# EAGLE board slice (EAGLE 5.11)
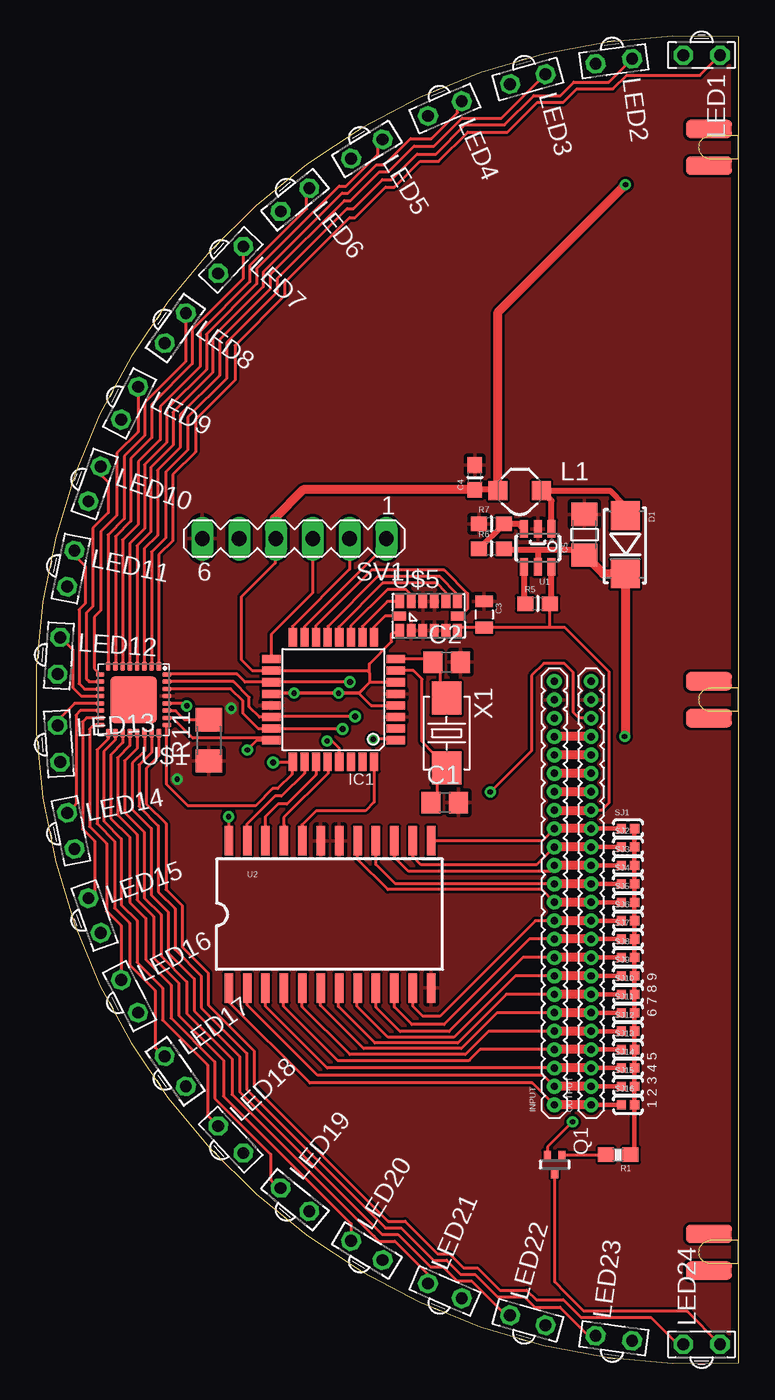
[diagram p0: board, top side]
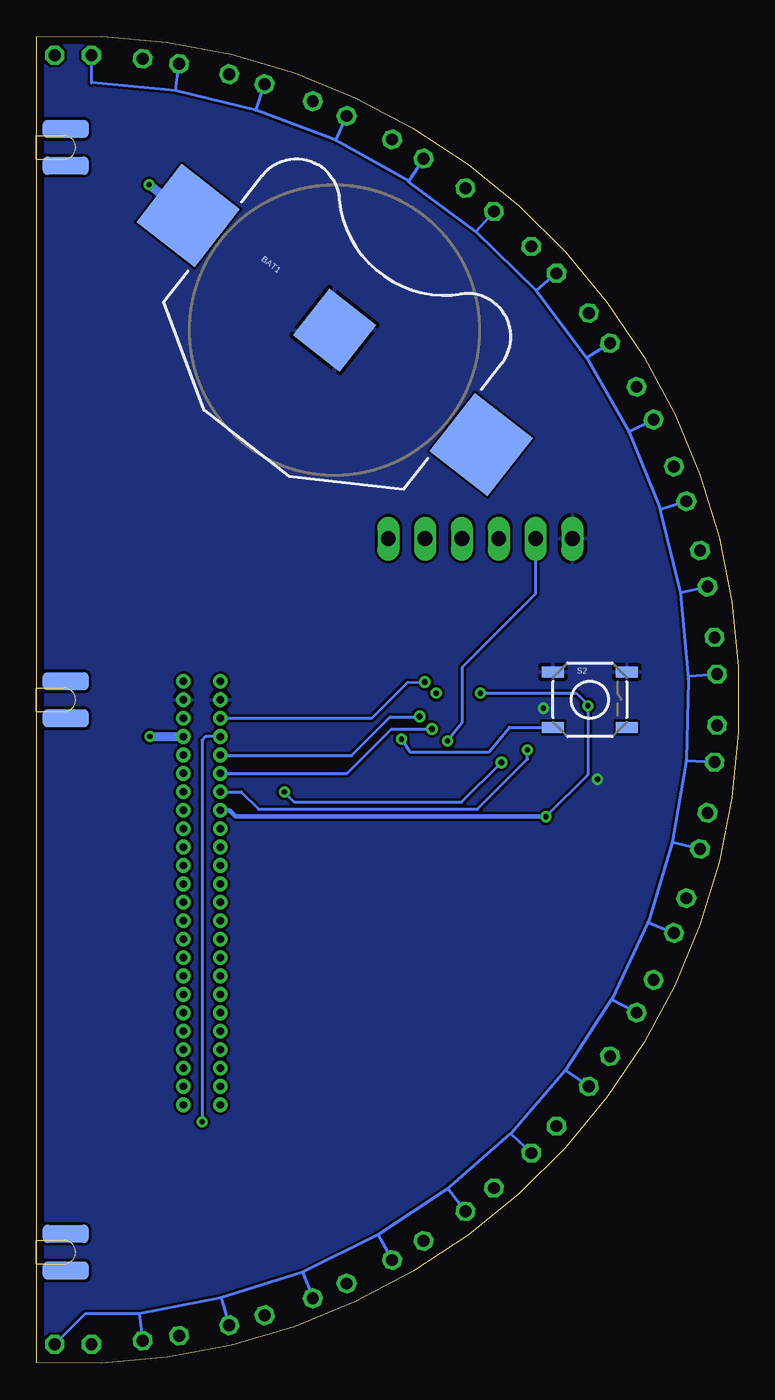
[diagram p1: board, bottom side, seen from below]

Size 48.44 x 91.53 mm. Coordinates in mm from the lower left corner, seen from the top.
Outline: 48.44,91.48 48.44,0.04 arc-187 48.44,91.48
Copper layers (1*16): Top 0.0356mm / dielectric 1.5011mm / Bottom 0.0356mm
Design rules "SilverCircuits": minimum track width 7mil, minimum drill 14mil, track to track 7mil, track to pad 7mil, pad to pad 7mil, via to via 7mil, smd to smd 0mil, copper to edge 20mil, drill to drill 8mil, minimum pad ring 10mil, minimum via ring 8mil, stop-mask expansion 4mil, vias tented up to drill 0mil, thermal gap 10mil

## Footprints (pad centres in the part's own frame; a part is rotated, then mirrored left to right if it is on the bottom)
BATTCON_20MM = smd 5.08 x 5.08: 1 -12.827,0; 3 12.827,0 | smd 4.064 x 4.064: 2 0,0
C0805 = smd 1.3 x 1.5: 1 -0.95,0; 2 0.95,0
0805 = smd 0.8 x 1.2: 1 -0.9,0; 2 0.9,0
0603 = smd 1.1 x 1: 1 -0.85,0; 2 0.85,0
1206 = smd 1.6 x 1.8: 1 -1.4,0; 2 1.4,0
SMA-DIODE = smd 2 x 2: A -2,0; C 2,0
TQFP32-08 = smd 1.27 x 0.559: 1 -4.293,2.8; 2 -4.293,2; 3 -4.293,1.2; 4 -4.293,0.4; 5 -4.293,-0.4; 6 -4.293,-1.2; 7 -4.293,-2; 8 -4.293,-2.8; 17 4.293,-2.8; 18 4.293,-2; 19 4.293,-1.2; 20 4.293,-0.4; 21 4.293,0.4; 22 4.293,1.2; 23 4.293,2; 24 4.293,2.8 | smd 0.559 x 1.27: 9 -2.8,-4.293; 10 -2,-4.293; 11 -1.2,-4.293; 12 -0.4,-4.293; 13 0.4,-4.293; 14 1.2,-4.293; 15 2,-4.293; 16 2.8,-4.293; 25 2.8,4.293; 26 2,4.293; 27 1.2,4.293; 28 0.4,4.293; 29 -0.4,4.293; 30 -1.2,4.293; 31 -2,4.293; 32 -2.8,4.293
1X24-1.27MM = drill 0.508 pad 1 round: 1 0,0; 2 1.27,0; 3 2.54,0; 4 3.81,0; 5 5.08,0; 6 6.35,0; 7 7.62,0; 8 8.89,0; 9 10.16,0; 10 11.43,0; 11 12.7,0; 12 13.97,0; 13 15.24,0; 14 16.51,0; 15 17.78,0; 16 19.05,0; 17 20.32,0; 18 21.59,0; 19 22.86,0; 20 24.13,0; 21 25.4,0; 22 26.67,0; 23 27.94,0; 24 29.21,0
1_3X1_3 = smd 1.3 x 1.3: P$1 -1.5,0; P$2 1.5,0
IRL80A = drill 0.813 octagon: A 0,-1.27; K 0,1.27
SOT416 = smd 0.6 x 0.5: 1 -0.65,0; 2 0.65,-0.5; 3 0.65,0.5
SPARKFUN_0603-RES = smd 1.1 x 1: 1 -0.85,0; 2 0.85,0
R1206 = smd 1.6 x 1.803: 1 -1.422,0; 2 1.422,0
TACTILE_SWITCH_SMD = smd 1.524 x 0.762: 1 -2.54,1.905; 2 2.54,1.905; 3 -2.54,-1.905; 4 2.54,-1.905
SJ_2S-NO = smd 0.635 x 0.635: 1 -0.45,0; 2 0.45,0
MA06-1 = drill 1.016 long: 1 -6.35,0; 2 -3.81,0; 3 -1.27,0; 4 1.27,0; 5 3.81,0; 6 6.35,0
SOT23-6 = smd 0.55 x 1.2: 1 -0.95,-1.3; 2 0,-1.3; 3 0.95,-1.3; 4 0.95,1.3; 5 0,1.3; 6 -0.95,1.3
SO-24DW = smd 0.584 x 2.032: 1 -6.35,-5.08; 2 -5.08,-5.08; 3 -3.81,-5.08; 4 -2.54,-5.08; 5 -1.27,-5.08; 6 0,-5.08; 7 1.27,-5.08; 8 2.54,-5.08; 9 3.81,-5.08; 10 5.08,-5.08; 11 6.35,-5.08; 12 7.62,-5.08; 13 7.62,5.08; 14 6.35,5.08; 15 5.08,5.08; 16 3.81,5.08; 17 2.54,5.08; 18 1.27,5.08; 19 0,5.08; 20 -1.27,5.08; 21 -2.54,5.08; 22 -3.81,5.08; 23 -5.08,5.08; 24 -6.35,5.08
QFN32 = smd 0.3 x 0.6: 1 -1.75,-2.3; 2 -1.25,-2.3; 3 -0.75,-2.3; 4 -0.25,-2.3; 5 0.25,-2.3; 6 0.75,-2.3; 7 1.25,-2.3; 8 1.75,-2.3; 17 1.75,2.3; 18 1.25,2.3; 19 0.75,2.3; 20 0.25,2.3; 21 -0.25,2.3; 22 -0.75,2.3; 23 -1.25,2.3; 24 -1.75,2.3 | smd 0.6 x 0.3: 9 2.3,-1.75; 10 2.3,-1.25; 11 2.3,-0.75; 12 2.3,-0.25; 13 2.3,0.25; 14 2.3,0.75; 15 2.3,1.25; 16 2.3,1.75; 25 -2.3,1.75; 26 -2.3,1.25; 27 -2.3,0.75; 28 -2.3,0.25; 29 -2.3,-0.25; 30 -2.3,-0.75; 31 -2.3,-1.25; 32 -2.3,-1.75 | smd 3.2 x 3.2: EXP 0,0
SLOT = smd 3.175 x 1.27: P$1 2.032,1.27; P$2 2.032,-1.27 | smd 3.175 x 1.27 bottom: P$3 2.032,1.27; P$4 2.032,-1.27
LGA-14 = smd 0.6 x 0.9: 1 -2,-1; 2 -1.2,-1; 3 -0.4,-1; 4 0.4,-1; 5 1.2,-1; 6 2,-1; 8 2,1; 9 1.2,1; 10 0.4,1; 11 -0.4,1; 12 -1.2,1; 13 -2,1 | smd 0.9 x 0.6: 7 2,0; 14 -2,0
5032 = smd 2.286 x 2.032: 1 -2.413,0; 2 2.413,0

## Placement (x,y rotation side)
BAT1  [BATTCON_20MM]  27.86,71.26 322 bottom
C1  [C0805]  28.19,38.67 0 top
C2  [C0805]  28.31,48.35 0 top
C3  [0805]  30.9,51.65 270 top
C4  10uF  [0603]  30.26,61.09 90 top
C5  22uF  [1206]  37.82,57.15 90 top
D1  MBRA210LT3G  [SMA-DIODE]  40.63,56.46 270 top
IC1  MEGA8-AI  [TQFP32-08]  20.5,45.77 180 top
INPUT  1X24-1.27MM  [1X24-1.27MM]  35.74,17.82 90 top
L1  2.2uH  [1_3X1_3]  33.36,60.18 0 top
LED1  [IRL80A]  45.9,90.21 270 top
LED2  [IRL80A]  39.85,89.8 277.8 top
LED3  [IRL80A]  33.91,88.57 285.7 top
LED4  [IRL80A]  28.2,86.53 293.5 top
LED5  [IRL80A]  22.81,83.74 301.3 top
LED6  [IRL80A]  17.85,80.24 309.1 top
LED7  [IRL80A]  13.42,76.1 317 top
LED8  [IRL80A]  9.59,71.4 324.8 top
LED9  [IRL80A]  6.44,66.21 332.6 top
LED10  [IRL80A]  4.02,60.65 340.4 top
LED11  [IRL80A]  2.38,54.81 348.3 top
LED12  [IRL80A]  1.56,48.8 356.1 top
LED13  [IRL80A]  1.56,42.73 3.9 top
LED14  [IRL80A]  2.38,36.72 11.7 top
LED15  [IRL80A]  4.02,30.88 19.6 top
LED16  [IRL80A]  6.44,25.31 27.4 top
LED17  [IRL80A]  9.59,20.13 35.2 top
LED18  [IRL80A]  13.42,15.42 43 top
LED19  [IRL80A]  17.85,11.28 50.9 top
LED20  [IRL80A]  22.81,7.79 58.7 top
LED21  [IRL80A]  28.19,4.99 66.5 top
LED22  [IRL80A]  33.91,2.96 74.3 top
LED23  [IRL80A]  39.85,1.73 82.2 top
LED24  [IRL80A]  45.9,1.31 90 top
OUTPUT  1X24-1.27MM  [1X24-1.27MM]  38.28,17.82 90 top
Q1  BC857AT115  [SOT416]  35.77,13.71 90 top
R1  620  [SPARKFUN_0603-RES]  40.15,14.39 180 top
R5  1M  [0603]  34.6,52.39 0 top
R6  95.3K  [0603]  31.4,56.19 0 top
R7  30.9K  [0603]  31.4,57.89 0 top
R11  [R1206]  11.91,42.96 90 top
S2  [TACTILE_SWITCH_SMD]  10.25,45.76 0 bottom
SJ1  SOLDERJUMPERNO  [SJ_2S-NO]  40.82,36.87 0 top
SJ2  SOLDERJUMPERNO  [SJ_2S-NO]  40.82,35.6 0 top
SJ3  SOLDERJUMPERNO  [SJ_2S-NO]  40.82,34.33 0 top
SJ4  SOLDERJUMPERNO  [SJ_2S-NO]  40.82,33.06 0 top
SJ5  SOLDERJUMPERNO  [SJ_2S-NO]  40.82,31.79 0 top
SJ6  SOLDERJUMPERNO  [SJ_2S-NO]  40.82,30.52 0 top
SJ7  SOLDERJUMPERNO  [SJ_2S-NO]  40.82,29.25 0 top
SJ8  SOLDERJUMPERNO  [SJ_2S-NO]  40.82,27.98 0 top
SJ9  SOLDERJUMPERNO  [SJ_2S-NO]  40.82,26.71 0 top
SJ10  SOLDERJUMPERNO  [SJ_2S-NO]  40.82,25.44 0 top
SJ11  SOLDERJUMPERNO  [SJ_2S-NO]  40.82,24.17 0 top
SJ12  SOLDERJUMPERNO  [SJ_2S-NO]  40.82,22.9 0 top
SJ13  SOLDERJUMPERNO  [SJ_2S-NO]  40.82,21.63 0 top
SJ14  SOLDERJUMPERNO  [SJ_2S-NO]  40.82,20.36 0 top
SJ15  SOLDERJUMPERNO  [SJ_2S-NO]  40.82,19.09 0 top
SJ16  SOLDERJUMPERNO  [SJ_2S-NO]  40.82,17.82 0 top
SV1  [MA06-1]  17.81,56.88 180 top
U1  LTC3426  [SOT23-6]  34.6,56.24 180 top
U2  CD74HC154M  [SO-24DW]  19.63,30.96 0 top
U$1  TLC5947  [QFN32]  6.71,45.76 180 top
U$2  SLOT  [SLOT]  48.44,83.86 180 top
U$3  SLOT  [SLOT]  48.44,45.76 180 top
U$4  SLOT  [SLOT]  48.44,7.66 180 top
U$5  MMA7455L  [LGA-14]  27.07,51.54 0 top
X1  [5032]  28.32,43.46 270 top

## Library data of the parts
BAT1 C3 S2 U2 = SparkFun
C1 C2 R11 = rcl
C4 C5 L1 R5-R7 = CH_passive
D1 = CH_semiconductors
IC1 = atmel; MPN: ATMEGA8-16AU; OC_FARNELL: 9171371; OC_NEWARK: 73M8863
INPUT OUTPUT SJ1-SJ16 U$2-U$4 = slice
LED1-LED24 = led
Q1 = zetex
R1 = Nullspace
SV1 = NSL
U1 = CH_Linear_technology
U$1 = lil_rgb
U$5 = MMA7455Lbreakoutboard-v1a
X1 = NSL_MiniQuad

## Nets
5V+: C5.1 D1.C INPUT.21 OUTPUT.21 Q1.3 R6.2 U1.5
!CS: IC1.14 U$5.7
A0: IC1.26 U2.23
A1: IC1.27 U2.22
A2: IC1.28 U2.21
A3: IC1.32 U2.20
BLANK: IC1.23 INPUT.19 OUTPUT.19 U$1.30
BUTTON: IC1.1 S2.3
COL1: LED1.K U$1.1
COL2: LED2.K U$1.2
COL3: LED3.K U$1.3
COL4: LED4.K U$1.4
COL5: LED5.K U$1.5
COL6: LED6.K U$1.6
COL7: LED7.K U$1.7
COL8: LED8.K U$1.8
COL9: LED9.K U$1.9
COL10: LED10.K U$1.10
COL11: LED11.K U$1.11
COL12: LED12.K U$1.12
COL13: LED13.K U$1.13
COL14: LED14.K U$1.14
COL15: LED15.K U$1.15
COL16: LED16.K U$1.16
COL17: LED17.K U$1.17
COL18: LED18.K U$1.18
COL19: LED19.K U$1.19
COL20: LED20.K U$1.20
COL21: LED21.K U$1.21
COL22: LED22.K U$1.22
COL23: LED23.K U$1.23
COL24: LED24.K U$1.24
GND: BAT1.2 C1.2 C2.2 C3.1 C4.2 C5.2 IC1.3 IC1.5 IC1.21 INPUT.23 OUTPUT.23 R7.1 R11.1 S2.1 S2.2 SV1.6 U1.2 U2.12 U2.18 U2.19 U$1.29 U$5.2 U$5.3 U$5.4 U$5.5 U$5.10 U$5.11
INT1/DRDY: IC1.13 U$5.8
INT2: IC1.12 U$5.9
LINE1: LED1.A LED2.A LED3.A LED4.A LED5.A LED6.A LED7.A LED8.A LED9.A LED10.A LED11.A LED12.A LED13.A LED14.A LED15.A LED16.A LED17.A LED18.A LED19.A LED20.A LED21.A LED22.A LED23.A LED24.A Q1.1
MISO: IC1.16 SV1.2
MOSI: IC1.15 SV1.1
N$1: R5.1 U1.4
N$2: Q1.2 R1.2
N$3: IC1.2
N$6: IC1.31
N$7: C1.1 IC1.7 X1.2
N$8: C2.1 IC1.8 X1.1
N$9: IC1.30
N$13: R11.2 U$1.27
N$22: D1.A L1.P$2 U1.1
N$28: R6.1 R7.2 U1.3
ROW: R1.1 SJ1.2 SJ2.2 SJ3.2 SJ4.2 SJ5.2 SJ6.2 SJ7.2 SJ8.2 SJ9.2 SJ10.2 SJ11.2 SJ12.2 SJ13.2 SJ14.2 SJ15.2 SJ16.2
ROW1: INPUT.1 OUTPUT.1 SJ16.1 U2.1
ROW2: INPUT.2 OUTPUT.2 SJ15.1 U2.2
ROW3: INPUT.3 OUTPUT.3 SJ14.1 U2.3
ROW4: INPUT.4 OUTPUT.4 SJ13.1 U2.4
ROW5: INPUT.5 OUTPUT.5 SJ12.1 U2.5
ROW6: INPUT.6 OUTPUT.6 SJ11.1 U2.6
ROW7: INPUT.7 OUTPUT.7 SJ10.1 U2.7
ROW8: INPUT.8 OUTPUT.8 SJ9.1 U2.8
ROW9: INPUT.9 OUTPUT.9 SJ8.1 U2.9
ROW10: INPUT.10 OUTPUT.10 SJ7.1 U2.10
ROW11: INPUT.11 OUTPUT.11 SJ6.1 U2.11
ROW12: INPUT.16 OUTPUT.16 SJ1.1 U2.13
ROW13: INPUT.15 OUTPUT.15 SJ2.1 U2.14
ROW14: INPUT.14 OUTPUT.14 SJ3.1 U2.15
ROW15: INPUT.13 OUTPUT.13 SJ4.1 U2.16
ROW16: INPUT.12 OUTPUT.12 SJ5.1 U2.17
RST: IC1.29 SV1.5
SCK: IC1.17 SV1.3
SCL/SPC: IC1.10 U$5.13
SCLK: IC1.22 INPUT.20 OUTPUT.20 U$1.31
SDA/SDI/SDO: IC1.11 U$5.12
SDO: IC1.9 U$5.14
SIN: IC1.19 INPUT.22 U$1.32
SOUT: IC1.25 OUTPUT.22 U$1.25
VCC: BAT1.1 C3.2 C4.1 IC1.4 IC1.6 IC1.18 IC1.20 INPUT.17 L1.P$1 OUTPUT.17 R5.2 SV1.4 U1.6 U2.24 U$1.28 U$5.1 U$5.6
XLAT: IC1.24 INPUT.18 OUTPUT.18 U$1.26

## Tracks (layer width: path | path; a pad name or v marks a point on that pad's centre or on a via)
5V+  (via drill 0.36)
  Top 0.203: Q1.3 35.27,14.92 v37.01,16.66
  Top 0.406: R6.2 32.34,56.1 34.62,56.1 | 34.62,56.1 37.12,56.1 37.47,55.75 C5.1 | U1.5 34.62,54.96 34.62,56.1
  Top 0.61: OUTPUT.21 INPUT.21 | v40.6,43.24 40.63,43.27 D1.C 39.11,54.46 C5.1
  Bottom 0.203: v37.01,16.66 37.01,42.97 36.75,43.22 INPUT.21
  Bottom 0.61: v40.6,43.24 38.3,43.24 OUTPUT.21
!CS
  Top 0.203: IC1.14 19.27,50.1 19.27,50.85 23.11,54.7 28.15,54.7 29.75,53.1 29.75,52.03 29.26,51.54 U$5.7
A0
  Top 0.203: U2.23 14.52,36.07 14.52,37.17 16.46,39.11 16.92,39.11 18.5,40.69 IC1.26
A1
  Top 0.203: U2.22 15.82,37.04 15.8,37.06 15.8,37.69 16.68,38.57 17.29,38.57 19.29,40.58 19.29,41.47 IC1.27
A2
  Top 0.203: U2.21 17.09,37.16 17.08,37.17 17.08,37.63 20.12,40.67 20.12,41.47 IC1.28
A3
  Top 0.203: U2.20 18.36,37.11 18.34,37.13 19.31,38.11 22.71,38.11 23.3,38.7 IC1.32
BLANK  (via drill 0.41)
  Top 0.203: U$1.30 13.42,46.51 14.26,45.68 14.26,44.82 15.32,43.75 16.19,43.75 IC1.23 16.24,43.75 v21.13,43.75
  Top 0.61: OUTPUT.19 INPUT.19
  Bottom 0.203: INPUT.19 26.99,40.68 23.93,43.75 v21.14,43.75 v21.13,43.75
BUTTON  (via drill 0.36)
  Top 0.203: IC1.1 24.73,43.04 v23.25,43.04
  Bottom 0.203: 12.79,43.61 S2.3 15.8,43.86 17.2,42.17 22.67,42.17 v23.25,43.04
COL1
  Top 0.203: U$1.1 8.46,55.76 9.42,56.72 9.42,61.28 10.99,62.85 10.99,65.1 13.71,67.81 13.71,70.2 17.14,73.63 17.14,74.54 21.62,79.02 22,79.02 24.1,81.13 24.71,81.13 26.48,82.9 27.76,82.9 29.78,84.92 32.52,84.92 34.56,86.97 36.37,86.97 37.29,87.89 39.79,87.89 40.73,88.83 45.79,88.83 LED1.K
COL2
  Top 0.203: U$1.2 7.96,55.96 8.93,56.92 8.93,61.47 10.46,63 10.46,65.24 13.14,67.93 13.14,70.39 16.62,73.87 16.62,74.81 21.44,79.64 21.87,79.64 23.88,81.65 24.52,81.65 26.28,83.41 27.58,83.41 29.58,85.41 32.3,85.41 34.33,87.44 36.18,87.44 37.09,88.36 39.5,88.36 LED2.K
COL3
  Top 0.203: U$1.3 7.46,56.19 8.37,57.1 8.37,61.59 9.94,63.16 9.94,65.42 12.65,68.13 12.65,70.6 16.13,74.08 16.13,75.07 21.26,80.2 21.7,80.2 23.67,82.17 24.29,82.17 26.07,83.95 27.45,83.95 29.38,85.89 32.11,85.89 LED3.K
COL4
  Top 0.203: U$1.4 6.96,56.39 7.9,57.33 7.9,61.79 9.43,63.31 9.43,65.59 12.18,68.34 12.18,70.78 15.66,74.25 15.66,75.26 21.1,80.71 21.51,80.71 23.47,82.66 24.03,82.66 25.84,84.46 27.26,84.46 29.07,86.27 29.07,86.75 LED4.K
COL5
  Top 0.203: U$1.5 6.46,56.55 7.47,57.56 7.47,61.98 9.01,63.51 9.01,65.8 11.74,68.54 11.74,70.98 15.21,74.45 15.21,75.5 20.9,81.19 21.38,81.19 23.57,83.38 23.57,84.08 LED5.K
COL6
  Top 0.203: U$1.6 5.96,56.78 7.04,57.86 7.04,62.18 8.55,63.69 8.55,65.98 11.3,68.73 11.3,71.15 14.74,74.59 14.74,75.71 18.65,79.62 18.65,80.86 LED6.K
COL7
  Top 0.203: U$1.7 5.47,57.02 6.52,58.07 6.52,62.39 7.97,63.84 7.97,66.13 10.77,68.93 10.77,71.31 14.28,74.82 LED7.K
COL8
  Top 0.203: U$1.8 4.96,57.13 6.07,58.25 6.07,62.57 7.49,63.99 7.49,66.27 10.32,69.09 LED8.K
COL9
  Top 0.203: U$1.9 4,47.92 4,51.46 4.46,51.92 4.46,57.37 5.57,58.47 5.57,60.92 5.56,60.92 5.56,62.77 7.02,64.23 LED9.K
COL10
  Top 0.203: U$1.10 3.64,47.01 3.45,47.21 3.45,51.75 3.91,52.2 3.91,57.6 4.97,58.67 4.97,60.79 4.45,61.31 LED10.K
COL11
  Top 0.203: U$1.11 4.39,46.49 3.33,46.49 2.96,46.87 2.96,51.98 3.39,52.41 3.39,54.98 2.64,55.72 LED11.K
COL12
  Top 0.203: U$1.12 3.12,46.01 2.51,46.62 2.51,49.22 1.67,50.06 LED12.K
COL13
  Top 0.203: U$1.13 2.64,45.51 1.47,44.34 LED13.K
COL14
  Top 0.203: U$1.14 3.05,45.01 2.74,44.71 2.74,38.58 LED14.K
COL15
  Top 0.203: U$1.15 3.48,44.51 3.2,44.24 3.2,36.84 4.02,36.02 4.02,32.5 LED15.K
COL16
  Top 0.203: U$1.16 3.96,44.01 3.68,43.73 3.68,37.02 4.85,35.84 4.85,31.2 5.85,30.2 LED16.K
COL17
  Top 0.203: U$1.17 4.95,43.45 4.95,43.06 4.19,42.3 4.19,37.22 5.4,36 5.4,31.39 6.43,30.36 6.43,27.49 8.2,25.71 8.2,21.78 8.82,21.17 LED17.K
COL18
  Top 0.203: U$1.18 5.46,42.99 4.65,42.18 4.65,37.39 5.87,36.18 5.87,36.13 5.87,31.61 6.95,30.53 6.95,27.66 8.72,25.89 8.72,23.67 11.82,20.58 11.82,17.1 12.55,16.37 LED18.K
COL19
  Top 0.203: U$1.19 5.97,42.8 5.14,41.97 5.14,37.59 6.45,36.28 6.45,31.79 7.55,30.69 7.55,27.84 9.3,26.09 9.3,23.82 12.32,20.8 12.32,18.28 16.17,14.42 16.17,12.65 16.74,12.08 LED19.K
COL20
  Top 0.203: U$1.20 6.46,42.6 5.61,41.75 5.61,37.81 6.95,36.47 6.95,31.96 8.09,30.82 8.09,27.96 9.83,26.22 9.83,23.98 12.92,20.89 12.92,18.42 21.72,9.62 LED20.K
COL21
  Top 0.203: U$1.21 6.95,43.45 6.95,42.39 6.1,41.54 6.1,37.99 7.46,36.63 7.46,32.09 8.61,30.94 8.61,28.1 10.39,26.31 10.39,24.12 13.51,21 13.51,18.54 23.3,8.76 23.64,8.42 24.74,8.42 27.03,6.13 LED21.K
COL22
  Top 0.203: U$1.22 7.47,42.24 6.62,41.39 6.62,38.21 7.94,36.89 7.94,32.3 9.1,31.14 9.1,28.32 10.89,26.52 10.89,24.31 14.05,21.16 14.05,18.71 23.87,8.89 24.95,8.89 27.2,6.64 28.05,6.64 29.02,5.67 30.03,5.67 32.4,3.31 LED22.K
COL23
  Top 0.203: U$1.23 7.97,42.14 7.09,41.27 7.09,38.41 8.42,37.07 8.42,32.51 9.57,31.36 9.57,28.53 11.39,26.71 11.39,24.52 14.53,21.38 14.53,18.89 24.08,9.33 25.18,9.33 27.41,7.1 28.3,7.1 29.28,6.13 30.28,6.13 31.83,4.58 33.67,4.58 34.39,3.86 36.14,3.86 38.1,1.9 LED23.K
COL24
  Top 0.203: U$1.24 8.45,43.46 8.45,41.89 7.59,41.03 7.59,38.59 8.96,37.22 8.96,32.68 10.07,31.57 10.07,28.7 11.86,26.91 11.86,24.7 15.03,21.53 15.03,19.05 24.28,9.8 25.44,9.8 27.7,7.55 28.51,7.55 29.48,6.58 30.45,6.58 31.98,5.05 33.83,5.05 34.49,4.39 36.36,4.39 37.58,3.17 40.03,3.17 40.03,3.16 42.41,3.16 44.25,1.31 LED24.K
GND  (via drill 0.36)
  other vias: 13.46,45.18 9.72,40.28
  pour Top: -3.25,97.1 51.08,97.1 51.08,-4.93 -3.25,-4.93 -3.25,97.1
  pour Bottom: -4.34,98.19 52.11,98.19 52.11,-6.02 -4.37,-6.02 -4.37,98.18
INT1/DRDY
  Top 0.203: IC1.13 20.12,50.08 20.12,50.82 23.55,54.25 27.86,54.25 29.07,53.04 U$5.8
INT2
  Top 0.203: IC1.12 20.88,50.09 20.88,50.79 23.89,53.8 27.64,53.8 28.27,53.17 U$5.9
LINE1
  Top 0.203: LED24.A 44.91,3.58 44.91,3.6 37.77,3.6 36.66,4.71 36.55,4.82 35.77,5.6 Q1.1
  Bottom 0.203: 41.33,3.42 LED23.A | 30.07,6.29 LED21.A | 24.87,8.86 LED20.A | LED19.A 20.05,12.06 20.18,11.97 | 15.7,15.82 15.73,15.84 20.18,11.97 | 15.7,15.82 LED18.A | 11.94,20.21 LED17.A | 8.72,25.09 8.76,25.1 11.94,20.21 | 8.72,25.09 LED16.A | 6.23,30.4 6.26,30.41 8.72,25.09 | 6.23,30.4 LED15.A | 4.56,35.94 LED14.A | 3.6,41.59 LED13.A | LED12.A 3.44,47.41 3.44,47.17 | 4,53.15 LED11.A | 5.37,58.92 5.42,58.9 4,53.15 | 5.37,58.92 LED10.A | 7.56,64.25 LED9.A | LED8.A 10.47,69.36 10.45,69.33 | 18.12,78.06 LED6.A | 22.73,81.53 22.75,81.49 18.12,78.06 | 22.73,81.53 LED5.A | 27.78,84.37 27.79,84.34 22.73,81.53 | 27.78,84.37 LED4.A | 33.29,86.42 LED3.A | 38.84,87.78 LED2.A | LED1.A 44.62,88.31 38.84,87.78 | 13.95,73.96 LED7.A | 30.07,6.29 35.68,4.52 | 24.87,8.86 30.07,6.29 | 20.18,11.97 24.87,8.86 | 11.94,20.21 15.7,15.82 | 4.56,35.94 6.23,30.4 | 3.6,41.59 4.56,35.94 | 3.44,47.17 3.6,41.59 | 4,53.15 3.44,47.17 | 7.56,64.25 5.37,58.92 | 10.45,69.33 7.56,64.25 | 13.95,73.96 10.45,69.33 | 13.95,73.96 18.12,78.06 | 27.78,84.37 33.29,86.42 | 33.29,86.42 38.84,87.78 | 35.68,4.52 LED22.A | 35.68,4.52 41.33,3.42 | 47.17,1.3 45.07,3.4 41.32,3.4 41.33,3.42 | 47.17,1.3 47.2,1.28 | 47.17,1.3 LED24.A
MISO
  Top 0.203: IC1.16 17.67,50.1 17.67,50.82 21.62,54.77 SV1.2
MOSI
  Top 0.203: IC1.15 18.51,50.81 24.16,56.46 SV1.1
N$1
  Top 0.406: R5.1 33.65,52.49 U1.4
N$2
  Top 0.203: Q1.2 39.27,14.36 R1.2
N$7
  Top 0.203: IC1.7 26.03,47.77 26.62,47.18 26.62,42.87 27.46,42.04 arc-90 28.32,41.17 X1.2 27.89,41.05 27.64,40.8 27.64,39.07 C1.1
N$8
  Top 0.203: X1.1 arc-90 27.86,46.34 27.86,47.76 arc-90 27.36,48.25 C2.1 arc90 27.13,48.58 24.81,48.58 IC1.8
N$13
  Top 0.203: U$1.27 | U$1.27 | U$1.27 9.04,44.99 9.62,44.99 10.23,44.38 R11.2
N$22
  Top 0.203: 40.08,58.34 D1.A
  Top 0.406: U1.1 35.55,59.48 L1.P$2 39.6,60.18 40.54,59.24 40.54,58.34 40.08,58.34
N$28
  Top 0.406: R6.1 R7.2 33.3,57.89 U1.3
ROW
  Top 0.305: R1.1 41.27,14.66 SJ16.2 SJ15.2 SJ14.2 SJ13.2 SJ12.2 SJ11.2 SJ10.2 SJ9.2 SJ8.2 SJ7.2 SJ6.2 SJ5.2 SJ4.2 SJ3.2 SJ2.2 SJ1.2
ROW1
  Top 0.203: INPUT.1 34.23,19.34 18.88,19.34 13.28,24.94 U2.1
  Top 0.305: SJ16.1 OUTPUT.1
  Top 0.61: OUTPUT.1 INPUT.1
ROW2
  Top 0.203: INPUT.2 34.98,19.86 19.42,19.86 14.55,24.73 U2.2
  Top 0.305: SJ15.1 OUTPUT.2
  Top 0.61: OUTPUT.2 INPUT.2
ROW3
  Top 0.203: INPUT.3 20.07,20.36 15.82,24.62 U2.3
  Top 0.305: SJ14.1 OUTPUT.3
  Top 0.61: OUTPUT.3 INPUT.3
ROW4
  Top 0.203: INPUT.4 30.62,21.63 29.9,20.91 29.89,20.91 29.84,20.86 20.8,20.86 17.06,24.6 17.06,25.85 U2.4
  Top 0.305: SJ13.1 OUTPUT.4
  Top 0.61: OUTPUT.4 INPUT.4
ROW5
  Top 0.203: INPUT.5 31.21,22.9 29.6,21.3 21.64,21.3 18.34,24.59 18.34,25.86 U2.5
  Top 0.305: SJ12.1 OUTPUT.5
  Top 0.61: OUTPUT.5 INPUT.5
ROW6
  Top 0.203: INPUT.6 31.8,24.17 29.33,21.7 22.58,21.7 19.61,24.68 19.61,25.86 U2.6
  Top 0.305: SJ11.1 OUTPUT.6
  Top 0.61: OUTPUT.6 INPUT.6
ROW7
  Top 0.203: INPUT.7 32.43,25.44 29.08,22.09 23.37,22.09 20.85,24.61 20.85,25.83 U2.7
  Top 0.305: SJ10.1 OUTPUT.7
  Top 0.61: OUTPUT.7 INPUT.7
ROW8
  Top 0.203: U2.8 22.15,25.86 22.15,24.61 24.28,22.48 28.81,22.48 33.04,26.71 INPUT.8
  Top 0.305: SJ9.1 OUTPUT.8
  Top 0.61: OUTPUT.8 INPUT.8
ROW9
  Top 0.203: 23.43,25.87 U2.9 23.45,25.87 23.45,24.55 25.11,22.89 28.48,22.89 33.57,27.98 INPUT.9
  Top 0.305: SJ8.1 OUTPUT.9
  Top 0.61: OUTPUT.9 INPUT.9
ROW10
  Top 0.203: INPUT.10 34.02,29.25 28.13,23.36 25.91,23.36 24.71,24.56 U2.10
  Top 0.305: SJ7.1 OUTPUT.10
  Top 0.61: OUTPUT.10 INPUT.10
ROW11
  Top 0.203: 25.96,25.86 U2.11 25.98,24.63 26.67,23.94 27.85,23.94 34.44,30.52 INPUT.11
  Top 0.305: SJ6.1 OUTPUT.11
  Top 0.61: OUTPUT.11 INPUT.11
ROW12
  Top 0.203: INPUT.16 34.91,36.04 U2.13
  Top 0.305: SJ1.1 OUTPUT.16
  Top 0.61: OUTPUT.16 INPUT.16
ROW13
  Top 0.203: INPUT.15 34.52,34.38 26.56,34.38 25.98,34.96 U2.14
  Top 0.305: SJ2.1 OUTPUT.15
  Top 0.61: OUTPUT.15 INPUT.15
ROW14
  Top 0.203: INPUT.14 35.74,33.92 25.68,33.92 24.73,34.87 24.73,34.99 24.71,35.01 U2.15
  Top 0.305: SJ3.1 OUTPUT.14
  Top 0.61: OUTPUT.14 INPUT.14
ROW15
  Top 0.203: INPUT.13 24.78,33.06 23.44,34.4 U2.16
  Top 0.305: SJ4.1 OUTPUT.13
  Top 0.61: OUTPUT.13 INPUT.13
ROW16
  Top 0.203: U2.17 22.15,36.02 | U2.17 22.14,36.01 | INPUT.12 34.87,32.67 24.26,32.67 22.17,34.76 U2.17
  Top 0.305: SJ5.1 OUTPUT.12
  Top 0.61: OUTPUT.12 INPUT.12
RST  (via drill 0.36)
  Top 0.203: IC1.29 20.9,42.42 20.39,42.93 v20.06,42.93
  Bottom 0.203: v20.06,42.93 19.07,44.16 19.07,47.99 14,53.06 SV1.5
SCK
  Top 0.203: SV1.3 19.08,53.14 16.21,50.27 IC1.17
SCL/SPC
  Top 0.203: IC1.10 22.5,50.82 24.22,52.54 U$5.13
SCLK  (via drill 0.41)
  Top 0.203: U$1.31 13.6,47.01 14.69,45.93 14.69,45.28 15.39,44.57 IC1.22 16.24,44.6 v21.99,44.6
  Top 0.61: OUTPUT.20 INPUT.20
  Bottom 0.203: INPUT.20 35.71,41.92 26.69,41.92 24.02,44.58 22.01,44.58 v21.99,44.6
SDA/SDI/SDO
  Top 0.203: IC1.11 21.7,50.84 24.24,53.38 25.49,53.38 25.87,53.01 U$5.12
SDO
  Top 0.203: IC1.9 23.3,50.77 24.07,51.54 U$5.14
SIN  (via drill 0.41)
  Top 0.203: U$1.32 13.85,47.52 14.4,46.97 IC1.19 v21.64,46.98
  Bottom 0.203: INPUT.22 25.29,44.49 22.83,46.96 v21.64,46.98
SOUT  (via drill 0.36, 0.41)
  Top 0.203: U$1.25 9.01,39.91 10.47,38.45 15.13,38.45 16.31,39.63 16.66,39.63 17.64,40.61 17.64,41.42 IC1.25 16.38,41.48 v16.35,41.44 | v31.32,39.39 34.17,42.24 34.17,47.42 35.01,48.27 36.43,48.27 37.05,47.66 37.05,44.9 37.45,44.49 OUTPUT.22
  Bottom 0.203: v16.35,41.44 19.1,38.7 30.65,38.7 31.32,39.37 v31.32,39.39
VCC  (via drill 0.36)
  Top 0.203: U$1.28 10.23,45.51 arc-90 v10.39,45.35 | U2.24 13.28,37.21 v13.28,37.7 v13.27,37.7 | 16.25,46.22 IC1.20 | 24.17,45.35 arc-90 24.2,45.37 IC1.4 23.1,45.37 22.27,46.21 | IC1.6 23.59,46.97 23.03,46.97 22.27,46.21 | 22.27,46.21 22.26,46.22 v20.85,46.22 v17.8,46.22 16.26,46.22 16.25,46.22 | 16.25,46.22 22.25,46.22 22.99,46.95 22.99,47.61 | 22.99,47.61 22.99,48.24 24.52,49.77 24.52,50.32 U$5.1 | 22.99,47.61 22.83,47.77 IC1.18 14.9,47.77 14.15,48.53 14.15,52.85 16.49,55.19 16.49,56.83 SV1.4 16.44,56.97 16.44,58.28 | 35.45,50.75 C3.2 29.27,50.75 U$5.6 | OUTPUT.17 39.02,38.15 39.54,38.67 39.54,47.68 36.47,50.75 35.45,50.75 | 35.45,50.75 R5.2 | L1.P$1 30.01,60.18 30.01,60.25
  Top 0.406: L1.P$1 31.86,60.24 C4.1 | R5.2 35.55,52.5 U1.6
  Top 0.61: INPUT.17 OUTPUT.17 | 30.01,60.25 18.42,60.25 16.44,58.28 | L1.P$1 31.86,72.48 v40.66,81.28
  Bottom 0.203: v13.27,37.7 10.39,40.58 v10.39,45.35 10.39,45.42 11.18,46.22 v17.8,46.22
  Bottom 0.305: INPUT.17 35.72,38.12 35.1,38.12 34.68,37.7 v13.27,37.7
  Bottom 0.61: BAT1.1 39.73,80.55 v40.66,81.28
XLAT  (via drill 0.36)
  Top 0.203: U$1.26 9.03,44.5 9.05,44.52 9.4,44.52 10.8,43.12 16.06,43.12 IC1.24 15.23,42.97 v14.56,42.31
  Top 0.61: OUTPUT.18 INPUT.18
  Bottom 0.203: INPUT.18 35.29,39.41 34.3,39.41 33.11,38.22 17.99,38.22 14.54,41.67 14.54,42.28 v14.56,42.31
  Bottom 0.305: INPUT.18

## Text on the board
tPlace: 6 7 8 9 | 1 2 3 4 5